# Altium PCB PX4FMUv1.7.1.PcbDoc (part 2 of 2)
Units mil, origin at the board's own origin, x right, y up, seen from the top; angles counter-clockwise.
Board outline 1988.19 x 1417.32 mil, 4 copper layers (Top, Route2, Route15, Bottom), stack 57.482 mil thick; 118 components, 107 nets, 492 pads, 250 vias.
Unrouted connection lines stored in the file: 62.
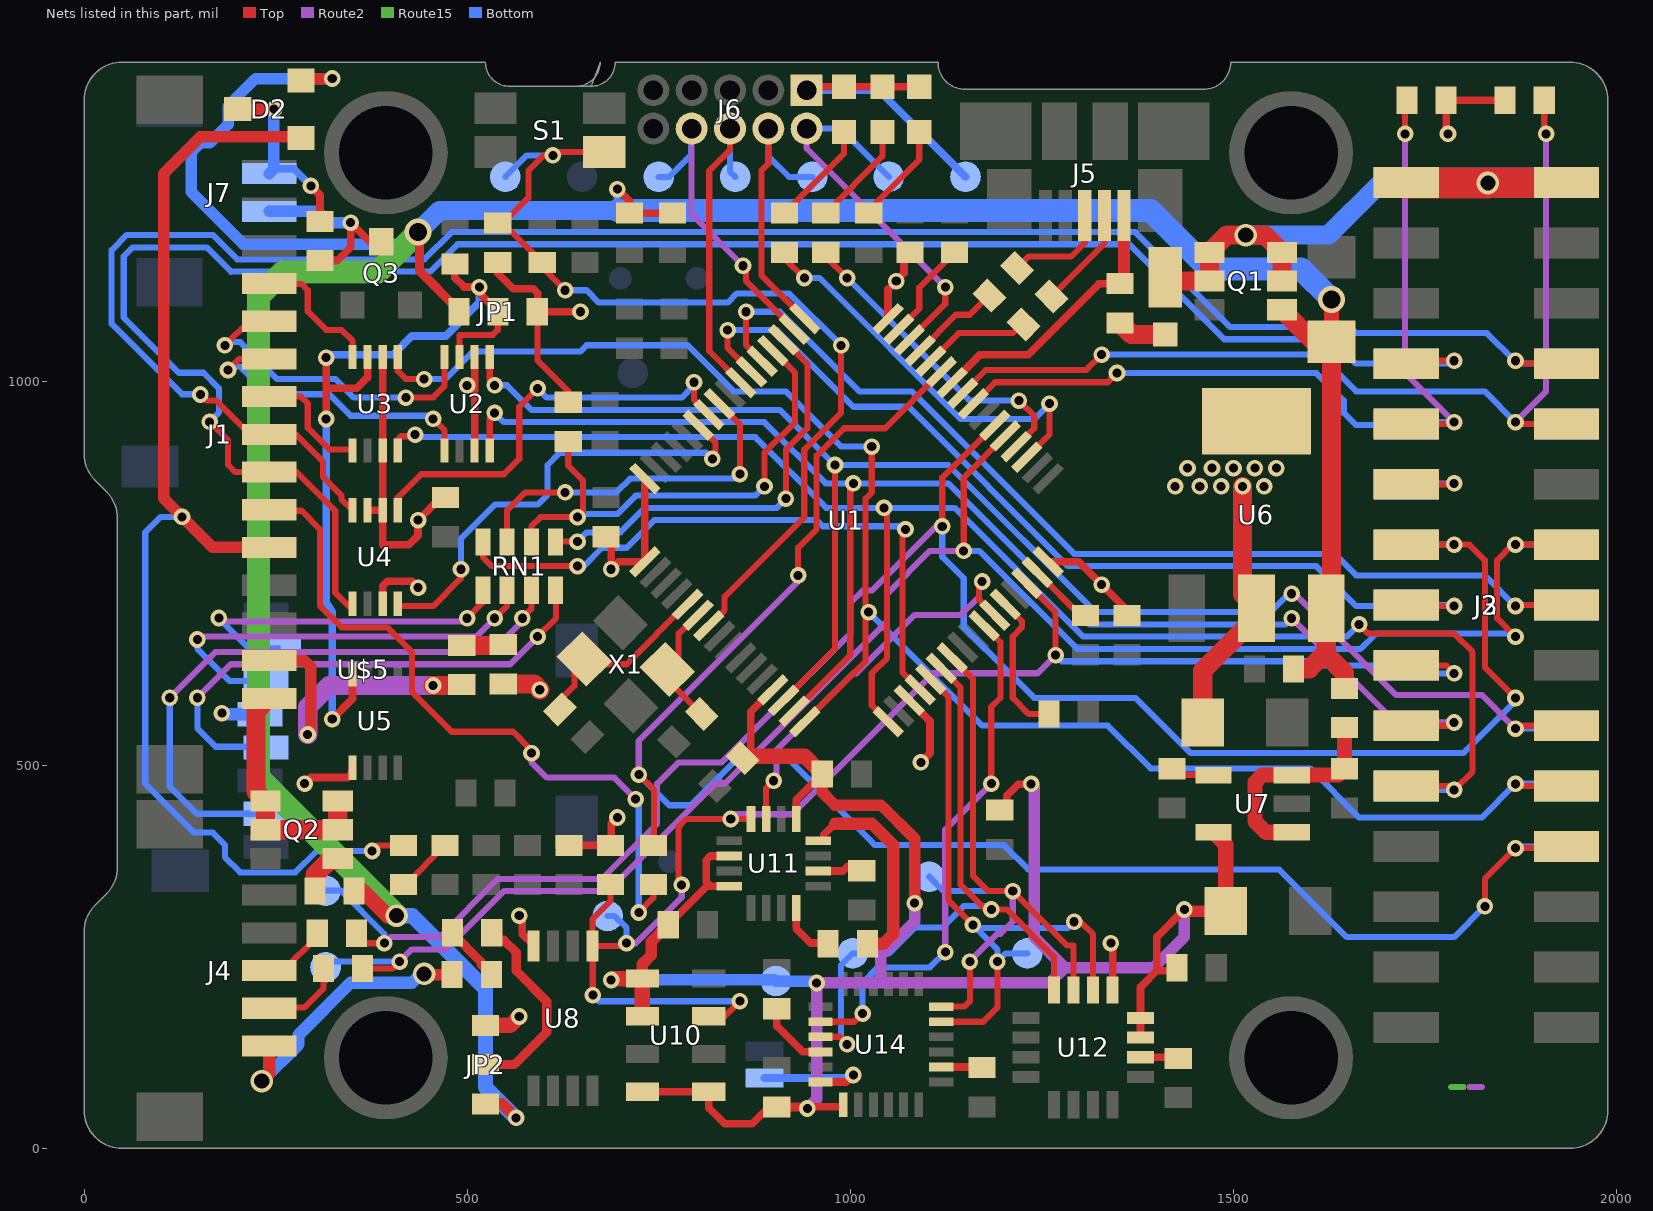
[diagram p4: the nets of this part, all layers, seen from the top]

## Via types
v1: diameter 21.65/21.65/21.65/21.65 (per signal layer), hole 11.81, Top to Bottom, 238 vias
v2: diameter 29.54/29.54/29.54/29.54 (per signal layer), hole 19.69, Top to Bottom, 8 vias
v3: diameter 35.43/35.43/35.43/35.43 (per signal layer), hole 23.62, Top to Bottom, 4 vias

## Nets (pads, with @x,y where several pads share a name; then routed paths per layer and width w, separated by ;. In a path a pad name is that pad's centre, name@x,y a point inside that pad or via, vN(x,y) a via of type N, cw(c..) or ccw(c..) an arc to the next point about the centre after c; other vN are vias at no path point) (continued)
I2C2_SDA: I2C2_SDA.P$1 J2.18 J3.18 R19.1 U1.30 U8.5 U10.7 U11.16 | length 2003.5
  Top w8: v1(663.69,200) 663.69,263.56 U8.5@663.08,264.18 ; R19.1@686.69,344.1 686.69,322.69 663.08,299.07 U8.5@663.08,264.18 ; v1(707.69,267.69) 704.18,264.17 U8.5@663.08,264.18 ; v1(779.69,343.69) 775.69,347.69 775.69,419.69 785.76,429.76 v1(843.69,429.76) U11.16@870.16,429.76 ; U10.7@815,172.3 835.98,172.29 v1(855.69,192) ; U1.30@1229.93,737.56 1267.69,699.8 v1(1267.69,643.68) ; J3.18@1725.16,630.24 1777.14,630.24 v1(1787.69,619.68)
  Route2 w8: v1(707.69,267.69) 719.69,267.69 779.69,327.69 v1(779.69,343.69) ; v1(843.69,429.76) 849.93,436 923.69,436 1107.69,620 1244.01,620 v1(1267.69,643.68)
  Bottom w8: v1(663.69,200) 671.69,192 v1(855.69,192) ; I2C2_SDA.P$1@683.08,303.15 692.23,303.15 707.69,287.69 v1(707.69,267.69) ; v1(1267.69,643.68) 1275.69,635.68 1611.69,635.68 1617.14,630.24 J2.18@1725.16,630.24 1735.71,619.68 v1(1787.69,619.68)
I2C3_SCL: J2.9 J3.9 R9.1 U1.41 | length 1351.3
  Top w8: U1.41@1146.41,985.32 1176.77,1015.69 1307.69,1015.69 v1(1327.69,1035.69) ; v1(1867.69,947.69) 1870.18,945.2 J3.9@1934.22,945.2 ; R9.1@1905.28,1367.69 1905.28,1326.09 v1(1907.69,1323.69)
  Route2 w8: v1(1867.69,947.69) 1907.69,987.69 v1(1907.69,1323.69)
  Bottom w8: v1(1327.69,1035.69) 1611.69,1035.69 1659.69,987.69 1827.69,987.69 v1(1867.69,947.69) 1870.18,945.2 J2.9@1934.22,945.2
I2C3_SDA: J2.10 J3.10 R7.1 U1.40 | length 1195.7
  Top w8: U1.40@1160.33,971.4 1188.61,999.69 1335.69,999.69 v1(1347.69,1011.69) ; v1(1723.69,1323.69) 1723.69,1367.69 R7.1@1726.1,1367.69 ; J3.10@1725.16,945.2 1785.2,945.2 v1(1787.69,947.69)
  Route2 w8: v1(1723.69,1323.69) 1723.69,1011.69 v1(1787.69,947.69)
  Bottom w8: v1(1347.69,1011.69) 1607.69,1011.69 1643.69,975.69 1643.69,959.69 1659.69,943.69 1723.65,943.69 J2.10@1725.16,945.2 1727.65,947.69 v1(1787.69,947.69)
JTCK-SWCLK: J6.4 JTCK-SWCLK.P$1 U1.49 | length 379.7
  Top w8: J6.4@892.69,1330.69 892.69,1284.69 883.69,1275.69 883.69,1139.47 U1.49@940.41,1082.76
  Bottom w8: J6.4@892.69,1330.69 892.69,1294.69 919.72,1267.65 JTCK-SWCLK.P$1@950.01,1267.65
JTDI: J6.8 JTDI.P$1 U1.50 | length 406.4
  Top w8: v1(859.69,1151.69) 863.69,1147.69 863.69,1131.63 U1.50@926.48,1068.84
  Route2 w8: J6.8@792.69,1330.69 792.69,1218.69 v1(859.69,1151.69)
  Bottom w8: JTDI.P$1@749.61,1267.65 763.66,1267.65 791.69,1295.69 791.69,1329.69 J6.8@792.69,1330.69
JTDO: J6.6 JTDO.P$1 U1.55 | length 425.6
  Top w8: J6.6@842.69,1330.69 842.69,1302.69 815.69,1275.69 815.69,1040.44 U1.55@856.89,999.24
  Bottom w8: J6.6@842.69,1330.69 842.69,1274.57 JTDO.P$1@849.61,1267.65
JTMS-SWDIO: J6.2 JTMS-SWDIO.P$1 U1.46 | length 503.6
  Top w8: U1.46@1076.81,1054.92 1123.69,1101.8 v1(1123.69,1123.69)
  Route2 w8: J6.2@942.69,1330.69 942.69,1304.69 v1(1123.69,1123.69)
  Bottom w8: J6.2@942.69,1330.69 986.97,1330.69 JTMS-SWDIO.P$1@1050.01,1267.65
LED_AMBER: R14.1 U1.35 | length 530.9
  Top w8: R14.1@913.69,1169.1 913.69,1161.69 v1(939.69,1135.69) ; U1.35@1229.93,901.8 1259.69,931.57 v1(1259.69,971.69)
  Bottom w8: v1(939.69,1135.69) 959.69,1135.69 1143.69,951.69 1239.69,951.69 v1(1259.69,971.69)
LED_BLUE: R15.1 U1.36 | length 413.3
  Top w8: R15.1@967.69,1169.1 967.69,1163.69 v1(995.69,1135.69) ; U1.36@1216.01,915.73 1239.69,939.41 1239.69,955.69 v1(1219.69,975.69)
  Bottom w8: v1(995.69,1135.69) 1155.69,975.69 v1(1219.69,975.69)
MAG_DRDY: U1.27 U11.15 | length 518.5
  Top w8: U11.15@889.85,429.76 889.85,469.84 v1(899.69,479.69) ; v1(1171.69,739.68) 1171.69,735.68 1167.69,731.68 1167.69,715.68 1187.58,695.8 U1.27@1188.17,695.79
  Route2 w8: v1(899.69,479.69) 903.38,483.37 903.38,519.68 1003.69,620 1007.69,620 1083.69,696 1143.69,696 1167.69,720 1167.69,735.68 v1(1171.69,739.68)
MPU_CS: U1.26 U14.8 | length 688.4
  Top w8: U14.8@960.95,165.22 1004.9,165.21 v1(1015.69,176) ; U1.26@1174.25,681.88 1195.69,660.44 1195.69,588 1183.69,576 v1(1183.69,476)
  Route2 w8: v1(1123.69,256) 1123.69,416 v1(1183.69,476)
  Bottom w8: v1(1015.69,176) 1015.69,216 1035.69,236 1103.69,236 v1(1123.69,256)
N$1: C4.2 U1.6 X1.1 | length 165.2
  Top w8: U1.6@801.21,695.79 799.8,695.8 775.69,671.68 775.69,639.44 X1.1@760.97,624.72 760.97,611.59 C4.2@805.86,566.7
N$2: C3.1 U1.5 X1.3 | length 249
  Top w8: C3.1@620.67,572.85 620.67,584.66 639.69,603.68 639.69,625.93 X1.3@652.41,638.64 659.36,631.68 707.69,631.68 785.73,709.72 U1.5@787.29,709.72
N$3: J1.2 L2.2 | length 396.3
  Top w15: J1.2@241.61,636.41 287.28,636.41 295.69,628 295.69,544 v1(291.69,540)
  Top w25: v1(455.38,604) 491.6,604 L2.2@492.69,605.09
  Route2 w25: v1(291.69,540) 291.69,576 319.69,604 v1(455.38,604)
N$4: D2.3 J7.1 R22.2 | length 242.7
  Top w10: v1(295.69,1256) 307.69,1244 R22.2@307.69,1209.59
  Top w15: D2.3@200.38,1356 v1(247.69,1356)
  Bottom w10: J7.1@247.69,1278.21 273.48,1278.21 v1(295.69,1256)
  Bottom w15: J7.1@241.3,1271.82 247.69,1278.21 v1(247.69,1356)
N$5: F2.2 L3.1 | length 75.5
  Top w12: F2.2@480.72,281.29 480.72,280.65 517.69,243.69 517.69,240.28 L3.1@531.28,226.69
N$8: J4.2 L5.2 | length 107.4
  Top w8: J4.2@241.61,182.79 242.82,184 287.69,184 312.1,208.41 L5.2@312.1,234.69
N$9: C16.1 U7.4 | length 57.2
  Top w8: C16.1@1419.69,495.28 1427.88,487.09 U7.4@1473.5,487.09
N$10: C24.1 U11.8 | length 76.8
  Top w10: U11.8@929.22,313.62 929.22,286.47 947.69,268 969.78,268 C24.1@970.79,267
N$11: J4.3 L4.2 | length 85.2
  Top w8: J4.3@241.61,232 245.61,236 263.69,236 300.1,272.41 300.1,276.69 L4.2@304.1,280.69
N$12: J1.11 U2.8 | length 434
  Top w8: v1(183.69,1047.69) 215.33,1079.32 J1.11@241.61,1079.33 ; v1(419.69,979.69) 420.01,980 455.69,980 470.16,994.47 U2.8@470.16,1032.71
  Bottom w8: v1(183.69,1047.69) 188.01,1052 203.69,1052 252.01,1003.69 327.69,1003.69 327.69,1004 352.01,979.69 v1(419.69,979.69)
N$13: J1.10 U2.1 | length 405.4
  Top w8: v1(187.69,1015.69) 202.12,1030.11 J1.10@241.61,1030.12 ; v1(455.44,951.87) 455.82,951.87 470.16,937.53 U2.1@470.16,910.67
  Bottom w8: v1(187.69,1015.69) 192.01,1020 203.69,1020 239.69,984 319.69,984 347.69,956 ; 347.82,955.87 347.69,956 ; v1(455.44,951.87) 451.31,956 347.69,956
N$14: L1.2 Q2.4 | length 60
  Top w25: L1.2@301.1,335.69 301.1,357.09 319.69,375.69 328.34,375.69 Q2.4@330.93,378.29
N$15: J1.12 U3.8 | length 181.3
  Top w8: J1.12@241.61,1128.54 242.15,1128 283.69,1128 291.69,1120 291.69,1092 315.69,1068 335.69,1068 350.16,1053.53 U3.8@350.16,1032.71 U3.8@350.16,1037.21
N$16: J1.9 U3.1 | length 156.4
  Top w8: J1.9@241.61,980.9 282.79,980.9 291.69,972 291.69,940 319.69,912 348.82,912 U3.1@350.16,910.67 U3.1@350.16,910.67
N$17: C24.2 U11.12 | length 278.3
  Top w10: U11.12@957.76,401.22 965.22,401.21 965.22,409.21 979.69,423.69
  Top w16: 979.69,423.69 1027.69,423.69 1055.69,395.69 1055.69,280 1042.69,267 C24.2@1021.97,267
N$18: F2.1 JP2.2 | length 260.5
  Top w12: JP2.2@523.69,109.28 561.28,109.28 603.69,151.69 603.69,191.69 563.69,231.69 563.69,255.69 547.69,271.69 541.51,271.69 F2.1@531.9,281.29
N$20: J2.12 J3.12 | length 126.1
  Top w8: J3.12@1725.16,866.46 1786.46,866.46 v1(1787.69,867.69)
  Bottom w8: J2.12@1725.16,866.46 1726.39,867.69 v1(1787.69,867.69)
N$21: RN1.5 U$5.2 | length 467
  Top w8: v1(499.69,691.68) 519.69,711.68 519.69,723.43 520.45,724.19 RN1.5@520.45,728.18
  Route2 w8: v1(175.69,692) 180.01,687.68 495.69,687.68 v1(499.69,691.68)
  Bottom w8: v1(175.69,692) 215.69,652 252.07,652 U$5.2@253.14,653.07
N$23: D1.ANODE L8.1 | length 65.2
  Top w25: L8.1@1351.69,1077.1 1366.69,1062.09 D1.ANODE@1410.69,1062.1
N$24: J4.1 L3.2 | length 364
  Top w15: v2(443.69,227.69) 444.69,226.69 L3.2@480.1,226.69
  Top w16: v2(231.69,87.69) 241.61,97.61 J4.1@241.61,133.57
  Bottom w16: v2(231.69,87.69) 279.69,135.69 279.69,148 347.69,216 427.69,216 439.38,227.69 v2(443.69,227.69)
N$25: J7.2 Q3.3 R22.1 | length 242.1
  Top w10: R22.1@307.69,1158.41 330.1,1158.41 347.69,1176 v1(347.69,1208) 372.7,1182.99 Q3.3@387.69,1183
  Bottom w15: J7.2@241.3,1222.61 305.08,1222.61 319.69,1208 v1(347.69,1208)
N$26: RN1.6 U$5.3 | length 561.9
  Top w8: v1(535.69,691.68) 551.69,707.68 551.69,727.94 RN1.6@551.94,728.18
  Route2 w8: v1(147.69,664) 151.38,667.68 511.69,667.68 v1(535.69,691.68)
  Bottom w8: v1(147.69,664) 147.69,652 189.93,609.76 U$5.3@237.39,609.76
N$27: F1.2 L2.1 | length 54.6
  Top w25: L2.1@492.69,656.27 545.97,656.28 F1.2@546.93,657.24
N$28: LED3.C R15.2 | length 136.5
  Top w8: R15.2@967.69,1220.28 1041.69,1294.28 LED3.C@1041.69,1326.16
N$29: LED1.C R13.2 | length 133.2
  Top w8: R13.2@1023.69,1220.28 1023.69,1224.28 1089.69,1290.28 LED1.C@1089.69,1326.16
N$30: LED2.C R14.2 | length 138.2
  Top w8: R14.2@913.69,1220.28 991.69,1298.28 LED2.C@991.69,1326.16
N$31: RN1.7 U$5.7 | length 803.3
  Top w8: v1(571.69,691.68) 571.69,692 583.69,704 583.69,727.94 RN1.7@583.44,728.18
  Route2 w8: v1(111.69,588) 171.38,647.68 531.69,647.68 571.69,687.68 v1(571.69,691.68)
  Bottom w8: v1(111.69,588) 111.69,472 147.15,436.54 U$5.7@237.39,436.54
N$32: RN1.8 U$5.5 | length 687.8
  Top w8: v1(591.69,667.68) 591.69,668 615.69,692 615.69,727.43 RN1.8@614.93,728.18
  Route2 w8: v1(147.69,588) 191.38,631.68 555.69,631.68 v1(591.69,667.68)
  Bottom w8: v1(147.69,588) 147.69,548 171.69,524 236.54,524 U$5.5@237.39,523.15
N$34: C25.1 U12.14 | length 49.9
  Top w10: U12.14@1378.49,118.89 1426.08,118.89 C25.1@1427.69,117.28
N$35: L10.1 R11.2 | length 75.2
  Top w8: L10.1@416.69,344.1 419.51,344.09 R11.2@470.69,395.28
N$36: C23.1 U11.10 | length 61.6
  Top w10: U11.10@957.76,361.85 989.85,361.84 995.69,367.69 1009.28,367.69 C23.1@1014.69,362.28
N$40: C20.1 U14.20 | length 55.4
  Top w10: U14.20@1118.43,106.16 1172.57,106.16 C20.1@1171.69,105.28
N$41: J1.1 Q2.1 Q2.2 Q2.5 Q2.6 | length 316
  Top w25: J1.1@241.61,587.2 240.81,587.2 224.41,570.8 224.41,465.12 Q2.1@236.45,453.09 Q2.2@236.45,415.69 Q2.5@330.93,415.69 Q2.6@330.93,453.09
N$42: C26.1 U14.10 | length 93.7
  Top w10: C26.1@903.69,182.1 903.69,159.69 937.53,125.84 U14.10@960.95,125.85
N$44: JP6.2 U14.12 | length 164.2
  Top w10: U14.12@960.95,86.48 994.48,86.47 v1(1003.69,95.69)
  Bottom w10: JP6.2@887.69,91.69 999.69,91.69 v1(1003.69,95.69)
N$100: C14.1 L11.2 U7.1 U7.3 | length 283.3
  Top w10: C14.1@1636.5,487.09 C14.1@1644.69,495.28
  Top w20: U7.1@1575.88,412.29 1542.09,412.28 1527.69,426.69 1527.69,477.69 1537.09,487.09 U7.3@1575.88,487.09 C14.1@1636.5,487.09 ; C14.1@1644.69,495.28 L11.2@1644.69,549.09
OTG_DM: J5.D- R6.1 | length 134.4
  Top w8: R6.1@1262.05,1111.41 1331.28,1180.65 J5.D-@1331.28,1217.13
OTG_DP: J5.D+ R8.1 | length 137.4
  Top w8: R8.1@1217.32,1148.82 1232.17,1163.69 1287.69,1163.69 1305.69,1181.69 J5.D+@1305.69,1217.13
OTG_FS_DM: R6.2 U1.44 | length 141.1
  Top w8: U1.44@1104.65,1027.08 1141.25,1063.69 1211.69,1063.69 1223.22,1075.22 R6.2@1225.86,1075.23
OTG_FS_DP: R8.2 U1.45 | length 120.1
  Top w8: U1.45@1090.74,1041 1137.42,1087.69 1155.69,1087.69 1180.64,1112.63 R8.2@1181.13,1112.64
PB2-BOOT1: R5.1 U1.28 | length 192.1
  Top w8: U1.28@1202.09,709.72 1223.69,688.12 1223.69,679.68 1211.69,667.68 1211.69,587.68 1232.69,566.68 R5.1@1259.1,566.68
POLY1:  | length 16
  Route15 w8: 1783.69,80 1799.69,80
POLY2:  | length 16
  Route2 w8: 1807.69,80 1823.69,80
PPM_INPUT: J2.23 J3.23 R10.1 U1.43 | length 2308.1
  Top w8: v1(723.69,487.69) 743.69,467.69 743.69,396.28 R10.1@742.69,395.28 ; v1(931.69,747.68) 931.69,783.68 955.69,807.68 955.69,903.69 991.69,939.69 1045.1,939.69 U1.43@1118.58,1013.16 ; v1(1827.69,315.69) 1827.69,351.69 v1(1867.69,391.69) 1931.89,391.69 J3.23@1934.22,394.02
  Route2 w8: v1(723.69,487.69) 723.69,531.68 931.69,739.68 v1(931.69,747.68)
  Bottom w8: v1(723.69,487.69) 763.69,447.69 791.37,447.69 851.69,508 919.69,508 1027.69,400 1027.38,400 1031.69,395.69 1200.01,395.69 1231.69,364 1559.69,364 1559.69,363.69 1647.69,275.69 1787.69,275.69 v1(1827.69,315.69) ; v1(1867.69,391.69) 1870.02,394.02 J2.23@1934.22,394.02
PPM_INPUT_CON: J1.6 R10.2 | length 926.8
  Top w8: J1.6@241.61,833.26 242.87,832 283.69,832 307.69,808 307.69,708 336.01,679.68 395.69,679.68 427.69,647.68 427.69,595.68 479.69,543.68 559.69,543.68 583.69,519.68 v1(583.69,515.68) ; v1(723.69,307.69) 742.69,326.69 R10.2@742.69,344.1
  Route2 w8: v1(583.69,515.68) 583.69,503.69 603.69,483.69 691.69,483.69 v1(719.69,455.69)
  Bottom w8: v1(719.69,455.69) 723.69,451.69 v1(723.69,307.69)
RESET: !RESET.P$1 C17.2 R16.1 S1.A1 U1.7 | length 1230.6
  Top w8: R16.1@539.69,1207.28 R16.1@546.51,1207.28 ; v1(627.69,1119.69) 597.69,1149.69 C17.2@597.69,1156.1 R16.1@546.51,1207.28 ; S1.A1@678.1,1299.69 678.56,1300.14 616.15,1300.14 v1(611.69,1295.69) 599.69,1295.69 579.69,1275.69 579.69,1240.46 R16.1@546.51,1207.28 ; U1.7@815.13,681.88 835.69,702.44 835.69,719.68 939.69,823.68 939.69,911.69 987.69,959.69 v1(987.69,1047.69)
  Bottom w8: !RESET.P$1@549.61,1267.65 577.64,1295.69 v1(611.69,1295.69) ; v1(627.69,1119.69) 655.69,1119.69 671.69,1103.69 839.69,1103.69 851.69,1115.69 919.69,1115.69 v1(987.69,1047.69)
SPI1_MISO: SPI1_MISO.P$1 U1.22 U12.4 U14.9 | length 872.6
  Top w8: U14.9@960.95,145.53 985.85,145.53 v1(995.69,135.69) ; U1.22@1118.58,626.2 1143.69,601.09 1143.69,343.69 1175.69,311.69 v1(1183.69,311.69) 1203.69,311.69 1265.3,250.07 U12.4@1265.3,206.49
  Bottom w8: v1(995.69,135.69) 995.69,136 987.69,144 987.69,239.34 SPI1_MISO.P$1@1002.68,254.33 1050.34,254.33 1050.34,254.65 1083.69,288 1119.69,288 1147.69,316 1179.69,316 1183.69,312 v1(1183.69,311.69)
SPI1_MOSI: SPI1_MOSI.P$1 U1.23 U12.3 U14.24 | length 848.8
  Top w8: U14.24@1118.43,184.9 1148.59,184.9 1155.69,192 v1(1155.69,243.69) ; U1.23@1132.49,640.12 1159.69,612.92 1159.69,355.69 1179.69,335.69 v1(1211.69,335.69) 1282.89,264.48 1290.89,264.48 U12.3@1290.89,206.49
  Route2 w8: v1(1155.69,243.69) 1155.69,244 1191.69,280 1195.69,280 1211.69,296 v1(1211.69,335.69)
  Bottom w8: SPI1_MOSI.P$1@1102.68,354.33 1121.33,335.69 v1(1211.69,335.69)
SPI1_SCK: SPI1_SCK.P$1 U1.21 U12.2 U14.23 | length 830.6
  Top w8: U1.21@1104.65,612.28 1127.69,589.24 1127.69,323.69 v1(1159.69,291.69) ; U14.23@1118.43,165.22 1173.22,165.21 1191.69,183.69 v1(1191.69,243.69) ; v1(1291.69,295.69) 1300.01,295.69 1316.49,279.2 U12.2@1316.49,206.49
  Bottom w8: v1@1160.01,291.69 v1(1159.69,291.69) ; SPI1_SCK.P$1@1230.68,254.33 1202.34,254.33 v1(1191.69,243.69) 1191.69,259.69 v1(1159.69,291.69) ; v1(1291.69,295.69) 1283.69,287.69 1163.69,287.69 v1(1159.69,291.69)
SPI3_MISO: R23.1 RN1.2 U1.52 | length 667.6
  Top w8: RN1.2@583.44,791.18 583.44,791.43 RN1.2@583.69,791.68 ; RN1.2@583.69,787.43 RN1.2@583.69,791.68 ; R23.1@631.69,922.41 631.69,891 650.69,872 650.69,827.68 646.69,823.68 v1(643.69,823.68) 595.69,823.68 583.69,811.68 RN1.2@583.69,791.68 ; v1(887.69,863.69) 887.69,907.69 927.69,947.69 927.69,1011.95 U1.52@898.65,1041
  Bottom w8: v1(643.69,823.68) 647.69,827.68 695.69,827.68 719.69,851.69 875.69,851.69 v1(887.69,863.69)
SPI3_MOSI: RN1.3 U1.57 | length 467.4
  Top w8: RN1.3@551.94,791.18 551.69,791.43 551.69,832 575.69,856 v1(627.69,856) ; U1.57@829.05,971.4 855.69,944.76 v1(855.69,879.69)
  Bottom w8: v1(627.69,856) 694.59,856 712.6,874.02 850.02,874.02 v1(855.69,879.69)
SPI3_NSS: RN1.4 U1.20 | length 826.5
  Top w8: RN1.4@520.45,791.18 520.45,770.93 531.69,759.68 v1(643.69,759.68) ; v1(1071.69,807.68) 1071.69,803.68 1067.69,799.68 1067.69,621.41 U1.20@1090.74,598.36
  Bottom w8: v1(643.69,759.68) 651.69,759.68 675.69,783.68 707.69,783.68 743.69,819.68 955.69,819.68 963.69,811.68 1067.69,811.68 v1(1071.69,807.68)
SPI3_SCK: RN1.1 U1.51 | length 555.9
  Top w8: RN1.1@614.93,791.18 615.44,791.68 v1(643.69,791.68) ; U1.51@912.57,1054.92 912.56,1054.81 943.69,1023.69 943.69,939.69 915.69,911.69 v1(915.69,847.69)
  Bottom w8: v1(643.69,791.68) 655.69,803.68 699.69,803.68 731.69,835.68 903.69,835.68 v1(915.69,847.69)
UART5_RX: J2.16 J3.16 U1.54 | length 1228.7
  Top w8: v1(839.69,1067.69) 839.69,1044.28 U1.54@870.8,1013.16 ; J3.16@1725.16,708.98 1726.45,707.68 v1(1787.69,707.68)
  Bottom w8: v1(839.69,1067.69) 903.69,1067.69 1003.69,967.69 1075.69,967.69 1283.69,759.68 1607.69,759.68 1659.69,707.68 1723.87,707.68 J2.16@1725.16,708.98 1786.4,708.98 v1(1787.69,707.68)
UART5_TX: J2.15 J3.15 U1.53 | length 1370.5
  Top w8: v1(863.69,1091.69) 863.69,1048.12 U1.53@884.73,1027.08 ; v1(1867.69,707.68) 1868.98,708.98 J3.15@1934.22,708.98
  Bottom w8: v1(863.69,1091.69) 907.69,1091.69 1011.69,987.69 1079.69,987.69 1291.69,775.68 1631.69,775.68 1659.69,747.68 1827.69,747.68 v1(1867.69,707.68) 1868.98,708.98 J2.15@1934.22,708.98
USART1_RX: U1.59 U4.4 | length 605.8
  Top w8: U4.4@409.22,710.66 412.19,707.68 455.69,707.68 491.69,743.68 v1(491.69,755.68) ; U1.59@801.21,943.57 823.69,921.09 823.69,903.69 v1(819.69,899.69)
  Bottom w8: v1(491.69,755.68) 491.69,795.68 535.69,839.69 536.01,840 591.69,840 604.69,853 604.69,856 604.69,891.69 620.69,907.69 623.69,907.69 811.69,907.69 v1(819.69,899.69)
USART1_RX_EXT: J1.7 J2.8 J3.8 U4.1 | length 2559.9
  Top w8: v1(163.69,948) 187.69,924 187.69,891.69 196.9,882.47 J1.7@241.61,882.48 277.22,882.47 327.69,832 327.69,725.13 346.16,706.66 U4.1@350.16,710.66 ; J3.8@1725.16,1023.94 1728.91,1027.69 v1(1787.69,1027.69)
  Bottom w8: v1(163.69,948) 175.69,960 175.69,992 155.69,1012 123.69,1012 51.69,1084 51.69,1164 63.38,1175.69 159.69,1175.69 191.69,1143.69 192.01,1144 451.69,1144 487.38,1179.69 1363.69,1179.69 1487.69,1055.69 1627.69,1055.69 1659.44,1023.94 J2.8@1725.16,1023.94 1783.94,1023.94 v1(1787.69,1027.69)
USART1_TX: U1.58 U4.5 | length 567.7
  Top w8: U4.5@409.22,832.7 409.22,849.21 439.69,879.69 547.69,879.69 567.69,899.69 567.69,967.69 v1(591.69,991.69) ; v1(795.69,999.69) 795.69,976.92 U1.58@815.13,957.48
  Bottom w8: v1(591.69,991.69) 603.69,979.69 779.69,979.69 795.69,995.69 v1(795.69,999.69)
USART1_TX_EXT: J1.8 J2.7 J3.7 U4.8 | length 2600.2
  Top w8: v1(151.69,983.69) 159.38,976 171.69,976 216.01,931.69 J1.8@241.61,931.69 276.01,931.69 311.69,896 311.69,876 335.69,852 335.69,847.18 U4.8@350.16,832.7 ; v1(1867.69,1027.69) 1871.44,1023.94 J3.7@1934.22,1023.94
  Bottom w8: v1@152.01,983.69 v1(151.69,983.69) 151.38,984 127.69,984 35.69,1076 35.69,1172 55.69,1192 167.69,1192 199.69,1160 443.69,1160 479.38,1195.69 1371.69,1195.69 1495.69,1071.69 1651.69,1071.69 1659.69,1063.69 1830.47,1063.69 1866.47,1027.69 v1(1867.69,1027.69) 1871.44,1023.94 J2.7@1934.22,1023.94
USART2_CTS: J2.19 J3.19 U1.14 U2.5 | length 2048.4
  Top w8: U2.5@529.22,1032.71 529.22,1002.16 v1(535.69,995.69) ; U1.14@912.57,584.44 979.69,651.57 v1(979.69,891.69) ; v1(1867.69,547.68) 1871.5,551.5 J3.19@1934.22,551.5
  Route2 w8: v1(1575.69,723.68) 1579.69,723.68 1711.69,591.68 1823.69,591.68 v1(1867.69,547.68)
  Bottom w8: v1(535.69,995.69) 551.69,995.69 583.69,963.69 907.69,963.69 v1(979.69,891.69) 1127.69,891.69 1319.69,699.68 1547.69,699.68 1571.69,723.68 v1(1575.69,723.68) ; v1(1867.69,547.68) 1930.41,547.68 J2.19@1934.22,551.5
USART2_RTS: J2.20 J3.20 U1.15 U2.4 | length 1935.8
  Top w8: U2.4@529.22,910.67 529.22,953.21 v1(535.69,959.69) ; U1.15@926.48,570.52 999.69,643.73 999.69,863.69 v1(1003.69,867.69) ; J3.20@1725.16,551.5 1783.88,551.5 1783.88,551.87 v1(1787.69,555.68)
  Route2 w8: v1(1575.69,691.68) 1711.69,555.68 v1(1787.69,555.68)
  Bottom w8: v1(535.69,959.69) 547.69,947.69 887.69,947.69 967.69,867.69 v1(1003.69,867.69) 1127.69,867.69 1311.69,683.68 1567.69,683.68 v1(1575.69,691.68) ; J2.20@1725.16,551.5 1728.97,555.31 1728.97,555.68 v1(1787.69,555.68)
USART2_RX: J2.22 J3.22 U1.17 U3.4 | length 2167.2
  Top w8: U3.4@409.22,910.67 409.22,924.96 413.39,929.13 429.64,929.13 v1(431.82,931.31) ; v1(1043.69,835.68) 1047.69,831.68 1047.69,639.68 1027.69,619.68 1027.69,577.89 U1.17@1048.97,556.6 ; v1(1663.69,683.68) 1675.69,671.68 1787.69,671.68 1811.69,647.68 1811.69,491.69 v1(1787.69,467.69) 1782.62,472.76 J3.22@1725.16,472.76
  Bottom w8: v1(431.82,931.31) 435.12,928 875.69,928 968.01,835.68 v1(1043.69,835.68) 1135.69,835.68 1303.69,667.68 1647.69,667.68 v1(1663.69,683.68) ; J2.22@1725.16,472.76 1730.23,467.69 v1(1787.69,467.69)
USART2_TX: J2.21 J3.21 U1.16 U3.5 | length 2222.3
  Top w8: U3.5@409.22,1032.71 409.22,1014.47 419.69,1004 443.38,1004 v1(443.69,1003.69) ; U1.16@940.41,556.6 1019.69,635.89 v1@1019.69,699.68 ; v1(1023.69,699.68) v1@1019.69,699.68 ; v1(1027.69,915.69) 1027.69,855.69 1019.69,847.69 v1@1019.69,699.68 ; v1(1867.69,475.69) 1870.62,472.76 J3.21@1934.22,472.76
  Bottom w8: v1(443.69,1003.69) 471.38,1003.69 507.69,1040 647.69,1040 655.69,1048 787.37,1048 847.69,987.69 915.69,987.69 987.69,915.69 v1(1027.69,915.69) ; v1(1023.69,699.68) 1171.69,551.68 1335.69,551.68 1391.69,495.69 1599.69,495.69 1663.69,431.69 1823.69,431.69 v1(1867.69,475.69) 1931.29,475.69 J2.21@1934.22,472.76
USART6_RX: J2.14 J3.14 L4.1 U1.38 USART6_RX.P$1 | length 2718.2
  Top w8: L4.1@355.28,280.69 367.28,268.69 367.28,267.69 v1(391.69,267.69) ; v1(1119.69,811.68) 1119.69,875.09 U1.38@1188.17,943.57 ; v1(1787.69,787.68) J3.14@1725.16,787.72 J3.14@1725.16,787.72 1807.66,787.72 1827.69,767.68 1827.69,627.68 v1(1867.69,587.68)
  Route2 w8: v1(391.69,267.69) 399.69,275.69 463.69,275.69 539.69,351.69 675.69,351.69 747.69,423.69 747.69,475.69 775.69,503.69 831.69,503.69 999.69,671.68 999.69,711.68 1015.69,727.68 1027.69,727.68 1111.69,811.68 v1(1119.69,811.68)
  Bottom w8: USART6_RX.P$1@314.97,336.22 335.15,336.22 391.69,279.69 v1(391.69,267.69) ; v1(1119.69,811.68) 1119.69,771.68 1147.69,743.68 1147.69,679.68 1239.69,587.68 1371.69,587.68 1443.69,515.68 1799.69,515.68 1867.69,583.68 v1(1867.69,587.68) ; J2.14@1725.16,787.72 v1(1787.69,787.68) v1(1787.69,787.68)
USART6_TX: J2.13 J3.13 L5.1 U1.37 USART6_TX.P$1 | length 2363
  Top w8: L5.1@363.28,234.69 402.69,234.69 v1(411.69,243.69) ; v1(1147.69,779.68) 1147.69,875.25 U1.37@1202.09,929.64 U1.37@1201.65,929.65 ; v1(1867.69,667.68) 1843.69,691.68 1843.69,767.68 1863.72,787.72 v1(1867.72,787.72) J3.13@1934.22,787.72
  Route2 w8: v1(411.69,243.69) 427.69,259.69 471.69,259.69 547.69,335.69 683.37,335.69 823.69,476 836.01,476 1047.69,687.68 1047.69,723.68 1103.69,779.68 v1(1147.69,779.68)
  Bottom w8: USART6_TX.P$1@315.5,235.69 USART6_TX.P$1@314.97,236.22 322.43,243.69 v1(411.69,243.69) ; v1(1147.69,779.68) 1167.69,779.68 1295.69,651.68 1665.69,651.68 1685.69,671.68 1863.69,671.68 v1(1867.69,667.68) ; v1(1867.72,787.72) J2.13@1934.22,787.72
VBAT_IN: D2.1 J1.5 L10.2 | length 1584.4
  Top w8: v1(375.69,388) 382.97,395.28 L10.2@416.69,395.28
  Top w15: J1.5@241.61,784.05 167.64,784.05 v1(127.69,824) 103.69,848 103.69,1272 151.69,1320 284.46,1320 D2.1@283.06,1318.6
  Bottom w8: v1(127.69,824) 99.69,824 79.69,804 79.69,476 143.69,412 167.69,412 183.69,396 183.69,380 203.69,360 275.69,360 303.69,388 v1(375.69,388)
VBUS: J5.VBUS L8.2 U1.42 | length 363.6
  Top w10: U1.42@1132.49,999.24 1168.93,1035.69 1231.69,1035.69 1324.28,1128.28 L8.2@1351.69,1128.28 L8.2@1356.87,1133.46
  Top w16: L8.2@1356.87,1133.46 J5.VBUS@1356.87,1217.13
VCAP_1: C11.1 U1.31 | length 88.3
  Top w8: U1.31@1243.85,751.48 C11.1@1302.69,692.63
  Top w10: C11.1@1302.69,692.63 1304.05,692.63 C11.1@1306.69,695.27
VCAP_2: C12.1 U1.47 | length 130.4
  Top w8: U1.47@1062.9,1068.84 1062.89,1068.89 1089.69,1095.69 1089.69,1123.09 C12.1@1135.69,1169.1
VDD_3V3: C2.1 C6.A C8.1 C9.1 C10.1 F1.1 J6.1 JP1.1 JP2.3 LED1.A LED2.A LED3.A R7.2 R9.2 R16.2 R19.2 R20.2 R23.2 U1.1 U1.19 U1.32 U1.48 U1.64 U2.3 U2.6 U3.3 U3.6 U4.3 U4.6 U4.7 U5.1 U6.2 U6.4 U8.8 U12.1 U$5.4 VDD_3V3.P$1 | length 2724.6
  Top w8: JP1.1@591.28,1091.69 591.69,1091.28 591.69,1028 631.69,988 R23.2@631.69,973.59
  Top w10: v1(287.69,476) 295.69,484 343.69,484 350.16,490.47 U5.1@350.16,496.66 ; U4.7@369.85,832.7 U4.6@389.53,832.7 ; U4.3@389.53,710.66 389.53,733.84 395.69,740 427.69,740 435.69,732 v1(435.69,731.68) ; U3.6@389.53,1032.71 U3.3@389.53,910.67 U4.6@389.53,832.7 ; C2.1@471.69,849.27 465.28,849.28 v1(435.69,819.68) 435.69,799.68 423.69,787.68 389.53,787.68 U4.6@389.53,832.7 ; v1(499.69,995.69) v1@509.53,995.69 ; U2.3@509.53,910.67 v1@509.53,995.69 ; U2.6@509.53,1032.71 v1@509.53,995.69 ; R16.2@539.69,1156.1 539.69,1141.69 559.69,1121.69 586.01,1121.69 591.69,1116 591.69,1092.09 JP1.1@591.28,1091.69 v1(647.69,1091.69) ; v1(567.69,303.69) 571.69,299.69 571.69,279.69 587.2,264.17 U8.8@586.3,264.18 ; R20.2@632.69,400.69 R20.2@632.69,395.28 R19.2@686.69,395.28 687.69,396.28 687.69,424 695.37,431.69 v1(695.69,431.69) ; C10.1@681.08,798.09 683.69,795.48 683.69,792 687.69,788 v1(687.69,755.68) 697.4,765.4 U1.1@731.61,765.4 U1.64@731.61,873.96 ; J6.1@942.69,1380.69 947.22,1385.21 LED2.A@991.69,1385.22 LED3.A@1041.69,1385.22 LED1.A@1089.69,1385.22 ; U1.48@1048.97,1082.76 1048.97,1120.97 v1(1059.69,1131.69) 1069.69,1141.69 1069.69,1157.69 1077.69,1165.69 C9.1@1077.69,1169.1 ; U1.19@1076.81,584.44 1103.69,557.57 1103.69,515.68 v1(1091.69,503.69) ; U1.32@1257.77,765.4 1297.98,765.4 v1(1327.69,735.68) 1360.69,702.68 C8.1@1360.69,695.27 ; v1(1339.69,267.69) 1342.08,265.3 U12.1@1342.08,206.49 ; U6.2@1527.69,691.68 1527.69,702.68 U6.2@1529.69,704.68 ; U6.4@1527.69,950.69 U6.4@1529.69,948.69 ; v1(1779.69,1323.69) 1777.28,1326.09 R7.2@1777.28,1367.69 R9.2@1854.1,1367.69
  Top w20: JP2.3@523.69,160.46 556.15,160.46 v1(567.69,172)
  Top w25: F1.1@546.93,606.06 586.86,606.06 v1(594.49,598.43) ; C6.A@1459.57,555.68 1459.57,623.57 U6.2@1527.69,691.68 ; v1(1511.69,863.69) 1511.69,722.68 U6.2@1529.69,704.68
  Bottom w10: J6.1@942.69,1380.69 1036.97,1380.69 VDD_3V3.P$1@1150.01,1267.65
  Bottom w16: v1(179.69,568) 181.23,566.46 U$5.4@229.52,566.46
  other v1: 1423.69,863.69 1455.69,863.69 1483.69,863.69 1539.69,863.69 1439.69,887.69 1471.69,887.69 1499.69,887.69 1527.69,887.69 1555.69,887.69
VDD_3V3_ANALOG: C13.A C15.1 C18.1 C19.1 C21.1 C22.1 C28.1 U1.13 U7.5 U10.1 U10.2 U10.4 U10.5 U11.2 U11.4 U11.13 U12.15 U12.16 U14.13 VDDA_3V3.P$1 | length 3051.1
  Top w10: U10.4@728.38,73.87 U10.5@815,73.87 815,52.69 835.69,32 871.69,32 893.78,54.09 C28.1@903.69,54.1 U14.13@987.69,54.09 ; C19.1@762.1,291.69 812.57,342.16 817.53,342.16 ; 811.69,347.69 811.69,348 ; U11.4@841.62,342.16 817.53,342.16 ; U11.2@841.62,381.53 817.22,381.53 811.69,376 811.69,348 ; C15.1@864.52,511.69 861.94,509.1 C15.1@859.11,509.1 869.69,519.68 869.69,569.68 898.37,598.37 U1.13@898.65,598.37 ; U11.13@929.22,429.76 929.22,454.8 C22.1@963.1,488.69 ; U14.13@989.33,54.09 U14.13@987.69,54.09 ; U14.13@990.48,56.94 990.48,56.88 U14.13@987.69,54.09 ; C18.1@1198.75,437.21 C18.1@1194.69,441.28 1203.69,450.28 1203.69,460 1218.97,475.28 1235.69,475.28 v1(1235.69,475.69) ; U12.15@1378.49,144.49 U12.16@1378.49,170.08 1378.49,210.49 1399.69,231.69 ; C21.1@1426.1,235.69 1422.1,231.69 1399.69,231.69 ; v1(1435.69,311.69) 1399.69,275.69 1399.69,231.69 ; 811.69,348 817.53,342.16
  Top w12: C28.1@903.69,54.1 943.69,54.09 v1(943.69,52)
  Top w15: U10.1@728.38,221.51 728.38,240.38 739.69,251.69 739.69,269.28 C19.1@762.1,291.69 ; C22.1@963.1,488.69 963.1,464.59 979.69,448 1039.69,448 1083.69,404 v1(1083.69,320) ; v1(1435.69,311.69) 1437.69,309.69 C13.A@1489.57,309.69
  Top w20: v1(687.69,219.69) 689.51,221.5 U10.1@728.38,221.51 U10.2@728.38,172.3 ; C15.1@864.52,511.69 940.1,511.69 C22.1@963.1,488.69 ; U7.5@1473.5,412.29 1489.57,396.22 C13.A@1489.57,309.69
  Route2 w15: v1(943.69,52) 955.69,64 v1(955.69,215.69) 956.01,216 1039.69,216 ; v1(1083.69,320) 1083.69,296 1039.69,252 1039.69,216 ; v1(1235.69,475.69) 1239.69,471.69 1239.69,275.69 1279.69,235.69 ; v1(1435.69,311.69) 1435.69,276 1395.38,235.69 1279.69,235.69 ; 1039.69,216 1259.38,216 1259.69,215.69 1279.69,235.69
  Bottom w12: v1(943.69,52) v1@943.69,56
  Bottom w15: v1@687.69,220 901.01,220 VDDA_3V3.P$1@902.68,218.33 953.04,218.33 v1(955.69,215.69)
  Bottom w20: v1(687.69,219.69) v1@687.69,220
VDD_5V: C7.1 C27.A D2.2 JP1.3 JP2.1 L1.1 L11.1 Q1.4 R1.2 R2.2 U6.3 | length 4397.9
  Top w10: v1(695.69,1251.69) 711.69,1235.69 R2.2@711.69,1220.28 R1.2@767.69,1220.28 ; 1620.69,644.28 1620.69,647.68
  Top w12: v3(435.69,1195.69) 437.69,1193.69 437.69,1144.91 488.92,1093.69 JP1.3@488.92,1091.69
  Top w15: D2.2@283.06,1393.4 285.66,1396 v1(323.69,1396) ; JP2.1@523.69,58.1 545.28,58.09 v1(563.69,39.69)
  Top w20: L1.1@352.28,335.69 363.69,335.69 395.69,303.69 v2(407.69,303.69) ; C27.A@1627.69,1067.69 v3(1627.69,1107.69)
  Top w25: Q1.4@1562.93,1094.29 1604.65,1052.57 C27.A@1627.69,1052.57 ; C7.1@1578.28,625.68 1598.69,625.68 1620.69,647.68 U6.3@1620.69,704.68 1627.69,711.68 C27.A@1627.69,1052.57 ; 1620.69,644.28 1644.69,620.28 L11.1@1644.69,600.27 ; C27.A@1627.69,1067.69 C27.A@1627.69,1052.57
  Route15 w30: v2(407.69,303.69) 227.69,483.69 227.69,1111.69 259.69,1143.69 383.69,1143.69 v3(435.69,1195.69)
  Bottom w10: 695.69,1223.69 v1(695.69,1251.69)
  Bottom w15: v1(323.69,1396) 223.69,1396 187.69,1360 187.69,1336 163.69,1312 151.69,1312 139.69,1300 139.69,1248 207.69,1180 420.01,1180 v3(435.69,1195.69)
  Bottom w20: v2(407.69,303.69) 428.01,303.69 523.69,208 523.69,79.69 v1(563.69,39.69)
  Bottom w25: v3(435.69,1195.69) 463.69,1223.69 695.69,1223.69
  Bottom w30: 695.69,1223.69 1391.69,1223.69 1467.69,1147.69 1587.69,1147.69 v3(1627.69,1107.69)
VDD_5V_IN: D1.CATHODE J2.1 J2.2 J3.1 J3.2 Q1.1 Q1.2 Q1.5 Q1.6 | length 1044.3
  Top w25: D1.CATHODE@1410.69,1136.9 1415.9,1131.69 Q1.2@1468.45,1131.69 Q1.1@1468.45,1169.09 1491.04,1191.69 v2(1515.69,1191.69) 1540.34,1191.69 Q1.6@1562.93,1169.09 Q1.5@1562.93,1131.69
  Top w40: J3.2@1725.16,1260.16 1725.63,1259.69 v2(1831.69,1259.69) 1832.16,1260.16 J3.1@1934.22,1260.16
  Bottom w25: v2(1515.69,1191.69) 1623.69,1191.69 J2.2@1691.69,1259.69 ; J2.2@1725.16,1260.16 1692.16,1260.16 J2.2@1691.69,1259.69 ; v2(1831.69,1259.69) J2.2@1691.69,1259.69
  Bottom w40: J2.2@1725.16,1260.16 J2.1@1934.22,1260.16
VDD_IO: C1.1 JP1.2 U2.7 U3.7 U5.8 | length 1082.6
  Top w8: U2.7@489.85,1032.71 489.85,1061.43 533.12,1061.43 539.69,1068 539.69,1091.28 JP1.2@540.1,1091.69
  Top w10: v1(315.69,951.69) 315.69,992 ; v1(315.69,1031.69) 315.69,992 ; v1(323.69,560) 350.16,586.47 U5.8@350.16,618.7 ; U3.7@369.85,1032.71 369.85,1005.84 369.53,1005.84 355.69,992 315.69,992 ; C1.1@483.69,1154.1 483.69,1136 495.69,1124 515.38,1124 v1(515.69,1123.69) 515.69,1116.09 JP1.2@540.1,1091.69
  Bottom w10: v1(315.69,951.69) 315.69,712 323.69,700 v1(323.69,560) ; v1(315.69,1031.69) 319.69,1035.69 403.38,1035.69 427.69,1060 471.69,1060 515.69,1104 v1(515.69,1123.69)
pads on no net: J1.S1 J1.S2 J4.4 J4.S1 J4.S2 J5.GND5 J5.GND6 J5.ID J6.7 J7.S1 J7.S2 S1.A2 S1.B4 U8.7 U10.6 U11.3 U11.5 U11.6 U11.7 U11.14 U12.6 U12.7 U14.2 U14.3 U14.4 U14.5 U14.6 U14.7 U14.14 U14.15 U14.16 U14.17 U14.19 U14.21 U14.22 U$1.P$1 U$2.P$1 U$3.P$1 U$4.P$1 U$5.1 U$5.8 U$5.NC U$5.NC1 U$5.NC2 U$5.NC3

## Polygon pours and split planes (outlines as drawn)
POLY2 on Route15 "Polygon_1_Net_POLY2" (solid, remove dead copper, pour order 1): 822.69,449 976.69,449 976.69,321.93 949.76,295 822.69,295
GND on Route15 "Polygon_1_Net_GND" (solid, remove dead copper, pour order 5): -21,1440.37 -21,-17 2020.69,-17 2020.69,1440.37
POLY1 on Route2 "Polygon_1_Net_POLY1" (solid, remove dead copper, pour order 4): 822.69,449 976.69,449 976.69,321.93 949.76,295 822.69,295
VDD_3V3 on Route2 "Polygon_1_Net_VDD_3V3" (solid, remove dead copper, pour order 6): -21,1440.37 -21,-17 2020.69,-17 2020.69,1440.37
VDD_3V3 on Top "Polygon_2_Net_VDD_3V3" (solid, remove dead copper, pour order 3): 1600.69,1064.69 1290.69,1064.69 1290.69,797.61 1325.62,762.68 1600.69,762.68
VDD_3V3 on Bottom "Polygon_3_Net_VDD_3V3" (solid, remove dead copper, pour order 2): 1299.69,807.68 1299.69,1011.69 1639.69,1011.69 1639.69,807.68
no net on bPlace "Polygon_1_NoNet" (solid, pour order 0): 1357.79,1381.27 1357.79,1293.96 1369.94,1293.96 1412.54,1331.91

## Keep-outs
Keep-Out Layer:
  the board outline again, w0

## Silkscreen, mask and mechanical layers (free items; w line width, h text height)
Dimension:
  the board outline again, w0
tDocu:
  text "5.0V" at 651.69,1179.69 h20.4 r90
  text "5.0V" at 571.69,939.69 h20.4 r90
  text "3.3V" at 651.69,935.69 h20.4 r90
  text "3.3V" at 583.69,695.68 h20.4 r90
tPlace:
  circle w12: c1163.69,511.69 r3.94
  circle w12: c1163.69,511.69 r25.59
  lines w11.81: 1163.69,540.32 1163.69,608.32
  lines w12: 1191.69,511.69 1275.69,511.69 ; 1275.69,511.69 1255.69,491.69 1255.69,531.68 1275.69,511.69 ; 1143.69,600.32 1183.69,600.32 1163.69,620.32 1143.69,600.32
  text "15" at 216.01,1300 h27.2
  text "JTAG" at 783.69,1247.69 h27.2
  text "ON" at 1147.69,1248 h23.43 r90
  text "ERR" at 1035.69,1236 h23.43 r90
  text "ACT" at 1091.69,1236 h23.43 r90
  text "RESET" at 577.61,1230.96 h16.74
  text "JP1" at 543.69,1027.69 h20.4
  text "MULTI" at 322.88,649.85 h27.2 r90
  text "Y" at 1195.69,579.68 h42.5
  text "1" at 238.95,528.81 h27.2
  text "X" at 1279.69,487.69 h42.5
  text "Z" at 1123.69,419.69 h42.5
  text "(c) 2012 mjs / lm" at 1391.44,294.87 h20.4 r90
  text "EXPANSION" at 1703.69,35.69 h27.2
  text "GPS" at 239.18,32.5 h27.2
  text "JP2" at 585.31,27.3 h20.4
bPlace:
  text "BUZZER" at 296.01,1376 h20.4
  text "VBAT" at 276.01,1326 h16.74
  text "FRONT" at 1331.63,1303.94 h50.2
  text "(+)" at 276.01,1298 h16.74
  text "+5V" at 1799.22,1287.4 h16.74
  text "+5V" at 1913.39,1287.4 h16.74
  text "GND" at 1736.23,1208.66 h16.74
  text "GND" at 1976.38,1208.66 h16.74
  text "(-)" at 276.01,1178 h16.74
  text "GND" at 276.01,1146 h16.74
  text "CAN2RX" at 1787.41,1129.92 h16.74
  text "CAN2TX" at 1976.38,1129.92 h16.74
  text "UART1_RX" at 1822.84,1051.18 h16.74
  text "UART1_TX" at 1976.38,1051.18 h16.74
  text "I2C3_SDA" at 1818.9,972.44 h16.74
  text "I2C3_SCL" at 1976.38,972.44 h16.74
  text "THIS SIDE UP" at 657.49,944.88 h50.2
  text "-NC-" at 1751.97,893.7 h16.74
  text "ADC10" at 1976.38,893.7 h16.74
  text "UART6_RX" at 1822.84,814.96 h16.74
  text "UART6_TX" at 1976.38,814.96 h16.74
  text "UART5_RX" at 1822.84,736.22 h16.74
  text "UART5_TX" at 1976.38,736.22 h16.74
  text "I2C2_SDA" at 1818.9,657.48 h16.74
  text "I2C2_SCL" at 1976.38,657.48 h16.74
  text "UART2RTS" at 1822.84,578.74 h16.74
  text "UART2CTS" at 1976.38,578.74 h16.74
  text "UART2_RX" at 1822.84,500 h16.74
  text "UART2_TX" at 1976.38,500 h16.74
  text "PX4FMU v1.7" at 1443.69,495.69 h66.93
  text "GPIO1" at 1763.78,421.26 h16.74
  text "PPM_IN" at 1976.38,421.26 h16.74
  text "ALARM" at 1771.66,342.52 h16.74
  text "GPIO2" at 1976.38,342.52 h16.74
  text "ADC11" at 1771.66,263.78 h16.74
  text "GND" at 1976.38,263.78 h16.74
  text "ADC13" at 1771.66,185.04 h16.74
  text "ADC12" at 1976.38,185.04 h16.74
dxf:
  lines w0.06: 19.69,31.5 ccw(c51.19,31.5) 51.19,0 1956.7,0 ccw(c1956.7,31.5) 1988.19,31.5 1988.19,1385.83 ccw(c1956.7,1385.83) 1956.7,1417.32 677.17,1417.32 cw(c645.68,1417.33) 645.67,1385.83 570.87,1385.83 cw(c570.87,1417.33) 539.37,1417.32 51.19,1417.32 ccw(c51.19,1385.83) 19.69,1385.83 19.69,31.5

## Text inside footprints (layer, text, board x,y; h text height)
J1: tDocu "1" at 273.11,581.3 h16.74 r90
J2: tPlace "1" at 1951.74,1334.96 h20.08 r270
J3: tPlace "1" at 1975.36,1342.84 h20.08 r90
J4: tDocu "1" at 273.11,125.7 h16.74 r90
J7: tDocu "1" at 272.8,1276.74 h16.74 r90
U11: tPlace "Z" at 881.97,379.56 h10.04; tPlace "Y" at 925.28,379.56 h10.04; tPlace "X" at 881.97,342.16 h10.04
U12: tDocu "Z" at 1276.13,159.25 h16.74 r270; tDocu "Y" at 1354.87,155.31 h16.74 r270; tDocu "X" at 1276.13,80.51 h16.74 r270
U14: tPlace "Z" at 996.38,179 h10.04 r90; tPlace "Y" at 1063.31,175.06 h10.04 r90; tPlace "X" at 1004.26,119.94 h10.04 r90
U$5: tDocu "card OUT" at -113,671.18 h27.2 r90; tDocu "card IN" at 36.6,647.56 h27.2 r90